# Altium PCB WirelessJoystick.PcbDoc
Units mil, origin at the board's own origin, x right, y up, seen from the top; angles counter-clockwise.
Board outline 4265 x 1465 mil, 2 copper layers (Top Layer, Bottom Layer); 19 components, 18 nets, 67 pads, 9 vias.
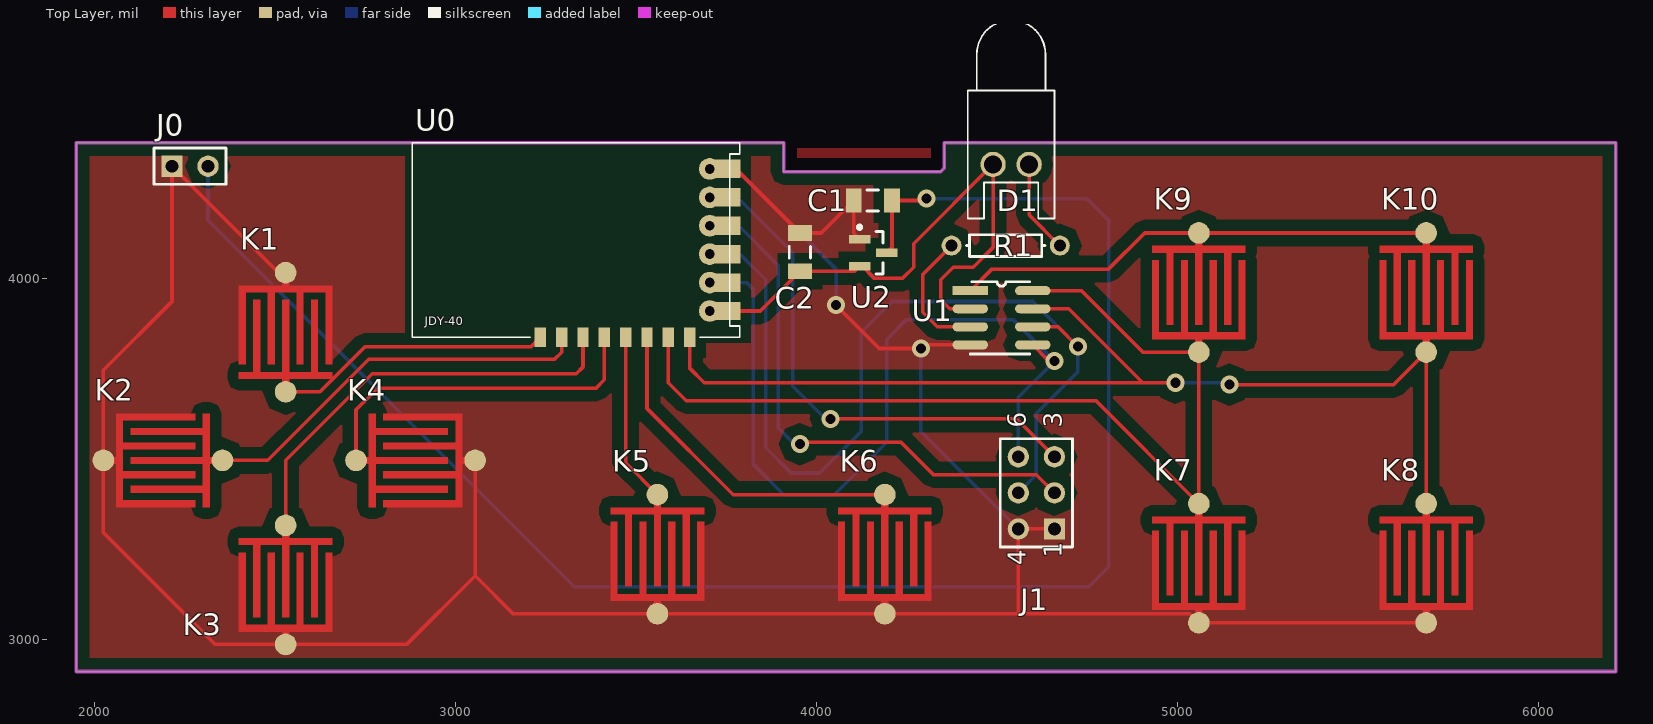
[diagram p0: Top Layer view]
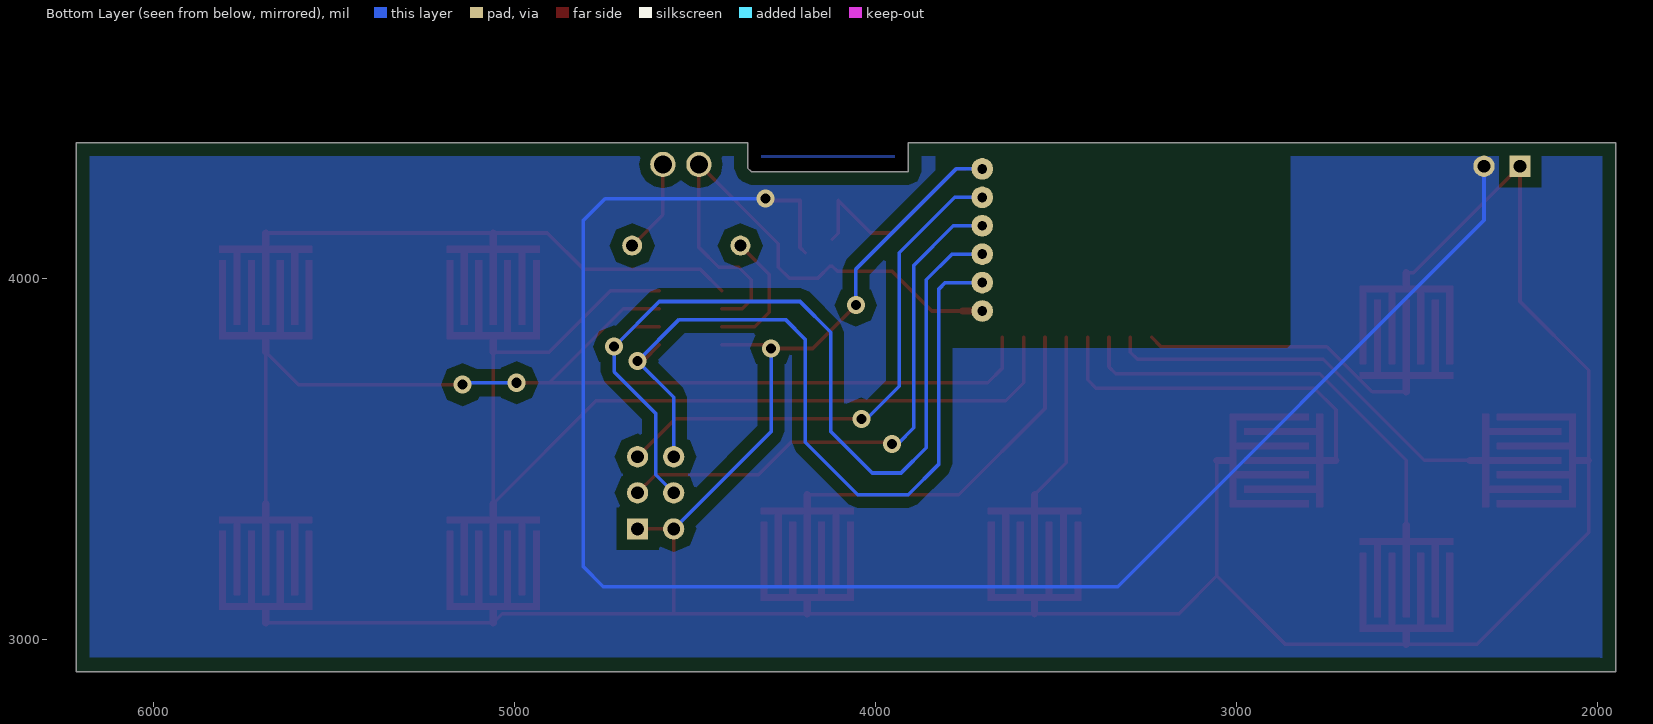
[diagram p1: Bottom Layer view, seen from below]

## Layer stack, top to bottom
Top Solder: solder mask 0.4, Solder Resist, Dk 3.5
Top Layer: signal copper 1.4
Dielectric 1: dielectric 12.6, FR-4, Dk 4.8
Bottom Layer: signal copper 1.4
Bottom Solder: solder mask 0.4, Solder Resist, Dk 3.5

## Board outline
1950,2910 1950,4375 3910,4375 3910,4295 4345,4295 4355,4305 4355,4375 6215,4375 6215,2910

## Design rules (kind name [scope] priority, off if disabled: settings)
Clearance Clearance_16 [InNamedPolygon('NETC1_2_L02_P006')] p1: gap=30 ignorepadtopadclearanceinfootprint=FALSE
Clearance Clearance_15 [InNamedPolygon('NETC1_1_L01_P004')] p2: gap=30 ignorepadtopadclearanceinfootprint=FALSE
Clearance Clearance_14 [InNamedPolygon('NETC1_1_L01_P004')] p3: gap=20 ignorepadtopadclearanceinfootprint=TRUE
Clearance Clearance_13 [InNamedPolygon('NETC1_1_L01_P004')] p4: gap=20 ignorepadtopadclearanceinfootprint=FALSE
Clearance Clearance_12 [InNamedPolygon('NETC1_2_L02_P002')] p5: gap=20 ignorepadtopadclearanceinfootprint=FALSE
Clearance Clearance_11 [InNamedPolygon('NETC1_1_L01_P000')] p6: gap=20 ignorepadtopadclearanceinfootprint=FALSE
Clearance Clearance_10 [InNamedPolygon('NETC1_1_L01_P000')] p7: gap=20 ignorepadtopadclearanceinfootprint=FALSE
Clearance Clearance_9 [InNamedPolygon('NETC1_1_L01_P000')] p8: gap=20 ignorepadtopadclearanceinfootprint=FALSE
Clearance Clearance_8 [InNamedPolygon('NETC1_1_L01_P000')] p9: gap=20 ignorepadtopadclearanceinfootprint=FALSE
Clearance Clearance_7 [InNamedPolygon('Top Layer-No Net')] p10: gap=20 ignorepadtopadclearanceinfootprint=FALSE
Clearance Clearance_6 [InNamedPolygon('NETC1_1_L01_P000')] p11: gap=10 ignorepadtopadclearanceinfootprint=FALSE except(0: Arc-Hole Track-Hole SMDPad-Hole THPad-Hole Via-Hole Fill-Hole Poly-Hole Region-Hole Text-Hole)
Clearance Clearance_5 [InNamedPolygon('NETC1_1_L01_P000')] p12: gap=50 ignorepadtopadclearanceinfootprint=FALSE
Clearance Test1 [InNamedPolygon('NETC1_1_L01_P000')] p13: gap=20 ignorepadtopadclearanceinfootprint=FALSE // test1
Clearance Clearance_4 [InNamedPolygon('NETC1_1_L01_P000')] p14: gap=10 ignorepadtopadclearanceinfootprint=FALSE except(0: Arc-Hole Track-Hole SMDPad-Hole THPad-Hole Via-Hole Fill-Hole Poly-Hole Region-Hole Text-Hole)
Clearance xxxx [InNamedPolygon('NETC1_1_L01_P000')] p15: gap=10 ignorepadtopadclearanceinfootprint=FALSE except(0: Arc-Hole Track-Hole SMDPad-Hole THPad-Hole Via-Hole Fill-Hole Poly-Hole Region-Hole Text-Hole)
Clearance Clearance_3 [InNamedPolygon('Top Layer-No Net')] p16: gap=10 ignorepadtopadclearanceinfootprint=FALSE except(0: Arc-Hole Track-Hole SMDPad-Hole THPad-Hole Via-Hole Fill-Hole Poly-Hole Region-Hole Text-Hole)
Clearance Clearance_2 [InNamedPolygon('Top Layer-No Net')] p17: gap=10 ignorepadtopadclearanceinfootprint=FALSE except(0: Arc-Hole Track-Hole SMDPad-Hole THPad-Hole Via-Hole Fill-Hole Poly-Hole Region-Hole Text-Hole)
Clearance Clearance_1 [InNamedPolygon('Top Layer-No Net')] p18: gap=10 ignorepadtopadclearanceinfootprint=FALSE
Clearance [All] p19: gap=10 ignorepadtopadclearanceinfootprint=FALSE except(0: Arc-Hole Track-Hole SMDPad-Hole THPad-Hole Via-Hole Fill-Hole Poly-Hole Region-Hole Text-Hole)
PolygonConnect PolygonConnect_19 [All vs IsNamedPolygon('NETC1_2_L02_P006')] p1: connectstyle=Direct reliefconductorwidth=10 reliefentries=4 polygonreliefangle="90 Angle" airgapwidth=10
PolygonConnect PolygonConnect_18 [All vs IsNamedPolygon('NETC1_1_L01_P004')] p2: connectstyle=Direct reliefconductorwidth=10 reliefentries=4 polygonreliefangle="90 Angle" airgapwidth=10
PolygonConnect PolygonConnect_17 [All vs IsNamedPolygon('NETC1_1_L01_P004')] p3: connectstyle=Direct reliefconductorwidth=10 reliefentries=4 polygonreliefangle="90 Angle" airgapwidth=10
PolygonConnect PolygonConnect_16 [All vs IsNamedPolygon('NETC1_1_L01_P004')] p4: connectstyle=Direct reliefconductorwidth=10 reliefentries=4 polygonreliefangle="90 Angle" airgapwidth=10
PolygonConnect PolygonConnect_15 [All vs IsNamedPolygon('NETC1_2_L02_P002')] p5: connectstyle=Direct reliefconductorwidth=10 reliefentries=4 polygonreliefangle="90 Angle" airgapwidth=10
PolygonConnect PolygonConnect_14 [All vs IsNamedPolygon('NETC1_1_L01_P000')] p6: connectstyle=Direct reliefconductorwidth=10 reliefentries=4 polygonreliefangle="90 Angle" airgapwidth=10
PolygonConnect PolygonConnect_13 [All vs IsNamedPolygon('NETC1_1_L01_P000')] p7: connectstyle=Direct reliefconductorwidth=10 reliefentries=4 polygonreliefangle="90 Angle" airgapwidth=10
PolygonConnect PolygonConnect_12 [All vs IsNamedPolygon('NETC1_1_L01_P000')] p8: connectstyle=Relief reliefconductorwidth=10 reliefentries=4 polygonreliefangle="45 Angle" airgapwidth=10
PolygonConnect PolygonConnect_11 [All vs IsNamedPolygon('NETC1_1_L01_P000')] p9: connectstyle=Direct reliefconductorwidth=10 reliefentries=4 polygonreliefangle="90 Angle" airgapwidth=10
PolygonConnect PolygonConnect_10 [All vs IsNamedPolygon('Top Layer-No Net')] p10: connectstyle=Direct reliefconductorwidth=10 reliefentries=4 polygonreliefangle="90 Angle" airgapwidth=10
PolygonConnect PolygonConnect_9 [All vs IsNamedPolygon('NETC1_1_L01_P000')] p11: connectstyle=Direct reliefconductorwidth=10 reliefentries=4 polygonreliefangle="90 Angle" airgapwidth=10
PolygonConnect PolygonConnect_8 [All vs IsNamedPolygon('NETC1_1_L01_P000')] p12: connectstyle=Direct reliefconductorwidth=10 reliefentries=4 polygonreliefangle="90 Angle" airgapwidth=10
PolygonConnect oooo [All vs IsNamedPolygon('NETC1_1_L01_P000')] p13: connectstyle=Direct reliefconductorwidth=10 reliefentries=4 polygonreliefangle="90 Angle" airgapwidth=10
PolygonConnect PolygonConnect_7 [All vs IsNamedPolygon('Top Layer-No Net')] p14: thpad.connectstyle=Direct thpad.reliefconductorwidth=10 thpad.reliefentries=4 thpad.polygonreliefangle="90 Angle" thpad.airgapwidth=10 smdpad.connectstyle=Relief smdpad.reliefconductorwidth=10 smdpad.reliefentries=4 smdpad.polygonreliefangle="90 Angle" smdpad.airgapwidth=10 via.connectstyle=Relief via.reliefconductorwidth=10 via.reliefentries=4 via.polygonreliefangle="90 Angle" via.airgapwidth=10
PolygonConnect PolygonConnect_6 [All vs IsNamedPolygon('Top Layer-No Net')] p15: thpad.connectstyle=Direct thpad.reliefconductorwidth=10 thpad.reliefentries=4 thpad.polygonreliefangle="90 Angle" thpad.airgapwidth=10 smdpad.connectstyle=Direct smdpad.reliefconductorwidth=10 smdpad.reliefentries=4 smdpad.polygonreliefangle="90 Angle" smdpad.airgapwidth=10 via.connectstyle=Relief via.reliefconductorwidth=10 via.reliefentries=4 via.polygonreliefangle="90 Angle" via.airgapwidth=10
PolygonConnect PolygonConnect_5 [All vs IsNamedPolygon('Top Layer-No Net')] p16: connectstyle=Direct reliefconductorwidth=10 reliefentries=4 polygonreliefangle="90 Angle" airgapwidth=10
PolygonConnect PolygonConnect_4 [All vs IsNamedPolygon('Top Layer-No Net')] p17: connectstyle=Relief reliefconductorwidth=10 reliefentries=4 polygonreliefangle="90 Angle" airgapwidth=10
PolygonConnect PolygonConnect_3 [All vs IsNamedPolygon('Top Layer-No Net')] p18: thpad.connectstyle=Direct thpad.reliefconductorwidth=10 thpad.reliefentries=4 thpad.polygonreliefangle="90 Angle" thpad.airgapwidth=10 smdpad.connectstyle=Direct smdpad.reliefconductorwidth=10 smdpad.reliefentries=4 smdpad.polygonreliefangle="90 Angle" smdpad.airgapwidth=10 via.connectstyle=Relief via.reliefconductorwidth=10 via.reliefentries=4 via.polygonreliefangle="90 Angle" via.airgapwidth=10
PolygonConnect PolygonConnect_2 [All vs IsNamedPolygon('Top Layer-No Net')] p19: connectstyle=Direct reliefconductorwidth=10 reliefentries=4 polygonreliefangle="90 Angle" airgapwidth=10
PolygonConnect PolygonConnect_1 [All vs IsNamedPolygon('Top Layer-No Net')] p20: thpad.connectstyle=Direct thpad.reliefconductorwidth=10 thpad.reliefentries=4 thpad.polygonreliefangle="90 Angle" thpad.airgapwidth=10 smdpad.connectstyle=Direct smdpad.reliefconductorwidth=10 smdpad.reliefentries=4 smdpad.polygonreliefangle="90 Angle" smdpad.airgapwidth=10 via.connectstyle=Relief via.reliefconductorwidth=10 via.reliefentries=4 via.polygonreliefangle="90 Angle" via.airgapwidth=10
PolygonConnect [All] p21: connectstyle=Relief reliefconductorwidth=10 reliefentries=4 polygonreliefangle="90 Angle" airgapwidth=10
RoutingVias [All] p1: holewidth=28 width=50 viastyle="Through Hole" minholewidth=28 minwidth=50 maxholewidth=28 maxwidth=50
SolderMaskExpansion [All] p1: expansion=4
Width [All] p1: maxlimit=10 minlimit=10 preferedwidth=10
30 further rules are at their usual default settings.

## Components (designator, comment, footprint, x,y, rotation, side; value= is the part's Value field where it differs from the comment)
C1 "Cap Semi" C1206 4156.85,4215 r0 top value=1uF
C2 "Cap Semi" C1206 3955,4071.85 r270 top value=1uF
D1 "RED LED" LED-0 4540,4315 r180 top
J0 "POWER" HDR1X2 2215,4310 r0 top
J1 "UART" HDR2X3_CEN 4660,3305 r90 top
K1 "UP" GoldFinger 2420,3760 r0 top
K2 "LEFT" GoldFinger 2280,3385 r90 top
K3 "DOWN" GoldFinger 2640,3240 r180 top
K4 "RIGHT" GoldFinger 2800,3605 r270 top
K5 "SELECT" GoldFinger 3670,3325 r180 top
K6 "START" GoldFinger 4300,3325 r180 top
K7 "B" GoldFinger 5170,3300 r180 top
K8 "A" GoldFinger 5800,3300 r180 top
K9 "TURBO B" GoldFinger 5170,4050 r180 top
K10 "TURBO A" GoldFinger 5800,4050 r180 top
R1 "680" AXIAL-0.3 4525,4090 r0 top
U0 "JDY-40" JDY-401 3235.79,3835.94 r90 top
U1 "STC15W204S-SOP8" SOP8 4426.77,3965 r0 top
U2 "XC6206" SOT23-3N 4157.6,4070 r0 top

## Footprints (in the part's own frame and the unit in brackets; to place one, negate y for a bottom-side part, rotate by r counter-clockwise, add the part's x,y. Pads: shape width x height; smd on the part's side, far side on the other; paste and mask are expansions set on the pad)
AXIAL-0.3 [mm] "Axial Device, Thru-Hole; 2 Leads; 0.3 in Pin Spacing"
  round 1.4 hole 0.85: 1(-3.81,0) 2(3.81,0)
  silkscreen extent -2.77,-0.76 2.77,0.76
C1206 [mm] "Chip Capacitor, Body 3.2x1.6mm, IPC High Density"
  rect 1.1x1.7 smd: 1(-1.35,0) 2(1.35,0)
  silkscreen extent -0.4,-0.75 0.4,0.75, body extent -1.7,-0.9 1.7,0.9, height 1.3
GoldFinger [mil]
  round 60 smd: 1(110,255) 2(110,-75)
  Top Layer region: -20,0 0,0 0,200 -20,200
  Top Layer region: 20,-20 40,-20 40,180 20,180
  Top Layer region: 60,0 80,0 80,200 60,200
  Top Layer region: 100,-20 120,-20 120,180 100,180
  Top Layer region: 140,0 160,0 160,200 140,200
  Top Layer region: -20,200 240,200 240,220 -20,220
  Top Layer region: -20,-40 240,-40 240,-20 -20,-20
  Top Layer region: 180,-20 200,-20 200,180 180,180
  Top Layer region: 220,0 240,0 240,200 220,200
  Top Layer lines w20: 110,-75 110,-30 ; 110,210 110,255
HDR1X2 [mm] "Connector; Header; 2 Position"
  rect 1.5x1.5 hole 0.9: 1(0,0)
  round 1.5 hole 0.9: 2(2.54,0)
  silkscreen extent -1.27,-1.27 3.81,1.27
HDR2X3_CEN [mm] "Connector; Header; 3x2 Position"
  rect 1.5x1.5 hole 0.9: 1(0,0)
  round 1.5 hole 0.9: 2(2.54,0) 3(5.08,0) 4(0,2.54) 5(2.54,2.54) 6(5.08,2.54)
  silkscreen extent -1.27,-1.27 6.35,3.81
JDY-401 [mm]
  rect 1.4x0.8 smd: 1(0,0) 2(0,-1.5) 3(0,-3) 4(0,-4.5) 5(0,-6) 6(0,-7.5) 7(0,-9) 8(0,-10.5)
  rect 1.3x2 smd: 9(1.85,-13.092) 10(3.85,-13.092) 11(5.85,-13.092) 12(7.85,-13.092) 13(9.85,-13.092) 14(11.85,-13.092)
  round 1.524 hole 0.7: 9(1.85,-11.918) 10(3.85,-11.918) 11(5.85,-11.918) 12(7.85,-11.918) 13(9.85,-11.918) 14(11.85,-11.918)
  Top Layer lines w0.051: 1.85,-11.918 1.85,-13.092 ; 3.85,-11.918 3.85,-13.092 ; 5.85,-11.918 5.85,-13.092 ; 7.85,-11.918 7.85,-13.092 ; 9.85,-11.918 9.85,-13.092 ; 11.85,-11.918 11.85,-13.092
  Top Layer lines w0.17: 7.636,-11.704 7.85,-11.918
  Top Layer lines w0.5: 1.85,-11.694 1.85,-11.918 1.85,-13.092 1.85,-13.319
  silkscreen extent 0,-14.02 13.7,9.01
LED-0 [mil] "LED; 2 Leads"
  round 70 hole 50: 1(50,0) 2(-50,0)
  silkscreen extent -120,-400 120,150
SOP8 [mm]
  rect 2.5x0.635 smd: 1(0,0)
  oval 2.5x0.635 smd: 2(0,-1.27) 3(0,-2.54) 4(0,-3.81) 5(4.4,-3.81) 6(4.4,-2.54) 7(4.4,-1.27) 8(4.4,0)
  silkscreen extent 0,-4.44 4.19,0.64
SOT23-3N [mm] "SOT23, 3-Leads, Body 2.9x1.3mm, Pitch 0.95mm, Lead Span 2.5mm, IPC Medium Density"
  rect 1.5x0.6 smd: 1(-0.95,0.95) 2(-0.95,-0.95) 3(0.95,0)
  silkscreen extent -1.07,-1.5 0.7,1.92, body extent -0.7,-1.5 0.7,1.5, height 1.1

## Part data
C1 C2: "Capacitor (Semiconductor SIM Model)", LatestRevisionDate=29-May-2009, LatestRevisionNote="IPC-7351 Footprint Added.", PackageDescription="Chip Capacitor", PackageReference=C1206, Published=8-Jun-2000, Publisher="Altium Limited"
D1: library part LED0, "Typical INFRARED GaAs LED", LatestRevisionDate=08-Jul-2005, LatestRevisionNote="Mech Layer 1 removed.", PackageDescription="LED; 2 Leads", PackageReference=LED-0, Published=8-Jun-2000, Publisher="Altium Limited"
J0: library part "Header 2", "Header, 2-Pin", LatestRevisionDate=17-Jul-2002, LatestRevisionNote="Re-released for DXP Platform.", Publisher="Altium Limited"
J1: library part "Header 3X2A", "Header, 3-Pin, Dual row", LatestRevisionDate=17-Jul-2002, LatestRevisionNote="Re-released for DXP Platform.", Publisher="Altium Limited"
K1 K2 K3 K4 K5 K6 K7 K8 K9 K10: library part GoldFinger
R1: library part Res1, "Resistor", LatestRevisionDate=17-Jul-2002, LatestRevisionNote="Re-released for DXP Platform.", PackageDescription="Axial Device, Thru-Hole; 2 Leads; 0.3 in Pin Spacing", PackageReference=AXIAL-0.3, Published=8-Jun-2000, Publisher="Altium Limited"

## Via types
v1: diameter 50, hole 28, Top Layer to Bottom Layer, 9 vias

## Nets (pads, with @x,y where several pads share a name; then routed paths per layer and width w, separated by ;. In a path a pad name is that pad's centre, name@x,y a point inside that pad or via, vN(x,y) a via of type N, cw(c..) or ccw(c..) an arc to the next point about the centre after c; other vN are vias at no path point)
NetC1_1: C1.1 C2.1 J0.1 J1.1 J1.4 K1.1 K2.1 K3.1 K4.1 K5.1 K6.1 K7.1 K8.1 U0.14 U1.4 U2.1 | length 8292
  Top Layer w10: K1.1 2510,4015 J0.1 2215,3935 2025,3745 K2.1 2025,3295 2335,2985 K3.1 2865,2985 3055,3175 ; K4.1 3055,3175 ; U0.14@3751.2,4302.48 3777.52,4302.48 C2.1 4013.7,4125 C1.1 4103.7,4123.9 U2.1 ; v1(4055,3925) 4175,3805 v1(4290,3805) 4300,3815 U1.4 ; J1.1 J1.4 4560,3070 ; K8.1 K7.1 5035,3070 4560,3070 ; 3055,3175 3160,3070 K5.1 K6.1 4560,3070
  Bottom Layer w10: U0.14@3705,4302.48 3777.52,4302.48 4055,4025 v1(4055,3925) ; v1(4290,3805) 4290,3575 J1.4
NetC1_2: C1.2 J0.2 U2.3 | length 4816.3
  Top Layer w10: U2.3 4210,4085 C1.2 4300,4215 v1(4305,4220)
  Bottom Layer w10: J0.2 2315,4160 3330,3145 4755,3145 4810,3200 4810,4160 4750,4220 v1@4315,4220
NetC2_2: C2.2 D1.1 U0.9 U1.2 U2.2 | length 1531.5
  Top Layer w10: U0.9@3751.2,3908.78 3760.17,3908.78 3845.08,3908.78 C2.2 4106.3,4018.7 U2.2 4127.4,4032.6 4160,4000 4240,4000 4270,4030 4270,4095 D1.1 4490,4085 4435,4030 4380,4030 4345,3995 4345,3940 4370,3915 U1.2
NetD1_2: D1.2 R1.2 | length 260.2
  Top Layer w10: D1.2 4590,4175 R1.2
NetJ1_2: J1.2 U0.12 | length 1529.3
  Top Layer w10: v1(3955,3540) 3960,3545 4235,3545 4325,3455 4610,3455 J1.2
  Bottom Layer w10: U0.12@3705,4145 3785,4145 3895,4035 3895,3585 3940,3540 v1(3955,3540)
NetJ1_3: J1.3 U0.13 | length 1469.5
  Top Layer w10: v1(4040,3610) 4555,3610 J1.3
  Bottom Layer w10: U0.13@3705,4223.74 3781.26,4223.74 3935,4070 3935,3700 4025,3610 v1(4040,3610)
NetJ1_5: J1.5 U0.11 U1.6 | length 2574.3
  Top Layer w10: U1.6 4670,3865 v1(4725,3810)
  Bottom Layer w10: U0.11@3705,4066.26 3788.74,4066.26 3860,3995 3860,3530 3930,3460 4010,3460 4125,3575 4125,3850 4210,3935 4600,3935 v1(4725,3810) 4725,3740 4610,3625 4610,3455 J1.5
NetJ1_6: J1.6 U0.10 U1.5 | length 2283
  Top Layer w10: U1.5 4645,3770 v1(4660,3770)
  Bottom Layer w10: U0.10@3705,3987.52 3807.48,3987.52 3825,3970 3825,3485 3910,3400 4050,3400 4195,3545 4195,3830 4250,3885 4545,3885 v1(4660,3770) 4560,3670 J1.6
NetK1_2: K1.2 U0.1 | length 768.3
  Top Layer w10: K1.2 2625,3685 2750,3810 3209.84,3810 U0.1
NetK2_2: K2.2 U0.2 | length 1105.1
  Top Layer w10: K2.2 2480,3495 2760,3775 3275,3775 3294.84,3794.84 U0.2
NetK3_2: K3.2 U0.3 | length 1193.2
  Top Layer w10: K3.2 2530,3495 2770,3735 3335,3735 3353.9,3753.9 U0.3
NetK4_2: K4.2 U0.4 | length 980.3
  Top Layer w10: K4.2 2725,3635 2785,3695 3390,3695 3412.95,3717.95 U0.4
NetK5_2: K5.2 U0.5 | length 472.4
  Top Layer w10: U0.5 3472.01,3487.99 K5.2
NetK6_2: K6.2 U0.6 | length 954.9
  Top Layer w10: U0.6 3531.06,3638.94 3770,3400 K6.2
NetK7_2: K7.2 K9.1 U0.7 U1.8 | length 2685.1
  Top Layer w10: U0.7 3590.12,3709.88 3640,3660 4775,3660 K7.2 K9.1 4905,3795 4735,3965 U1.8
NetK8_2: K8.2 K10.1 U0.8 U1.7 | length 2992.1
  Top Layer w10: U0.8 3649.17,3750.83 3690,3710 4905,3710 ; U1.7 4700,3915 4905,3710 ; v1(4995,3710) 4905,3710 ; v1(5145,3705) 5600,3705 K10.1 K8.2
  Bottom Layer w10: v1(4995,3710) 5140,3710 v1(5145,3705)
NetK9_2: K9.2 K10.2 U1.1 | length 1329.5
  Top Layer w10: U1.1 4486.77,4025 4810,4025 4910,4125 K9.2 K10.2
NetR1_1: R1.1 U1.3 | length 366.5
  Top Layer w10: R1.1 4295,4010 4295,3905 4335,3865 U1.3

## Polygon pours and split planes (outlines as drawn)
NetC1_1 on Top Layer "NETC1_1_L01_P004" (solid, pour order 4): 1970,4360 1975,4355 1975,2930 6200,2930 6200,4360
NetC1_2 on Bottom Layer "NETC1_2_L02_P006" (solid, pour order 6): 1985,4340 1985,2950 1990,2945 1995,2950 6180,2950 6180,4335 6175,4340

## Keep-outs
Top Layer:
  the board outline again, w10

## Other copper
Top Layer:
  pour cut-out: 2860,4375 2860,3820 3820,3820 3820,4375
Bottom Layer:
  pour cut-out: 2850,4375 2850,3815 2860,3805 3835,3805 3835,4365 3825,4375

## Text inside footprints (layer, text, board x,y; h text height)
J1: Top Overlay "4" at 4580,3205 h50 r90; Top Overlay "1" at 4680,3225 h50 r90; Top Overlay "3" at 4680,3585 h50 r90; Top Overlay "6" at 4580,3585 h50 r90